# EAGLE board ai_aurora (EAGLE 7.1.0)
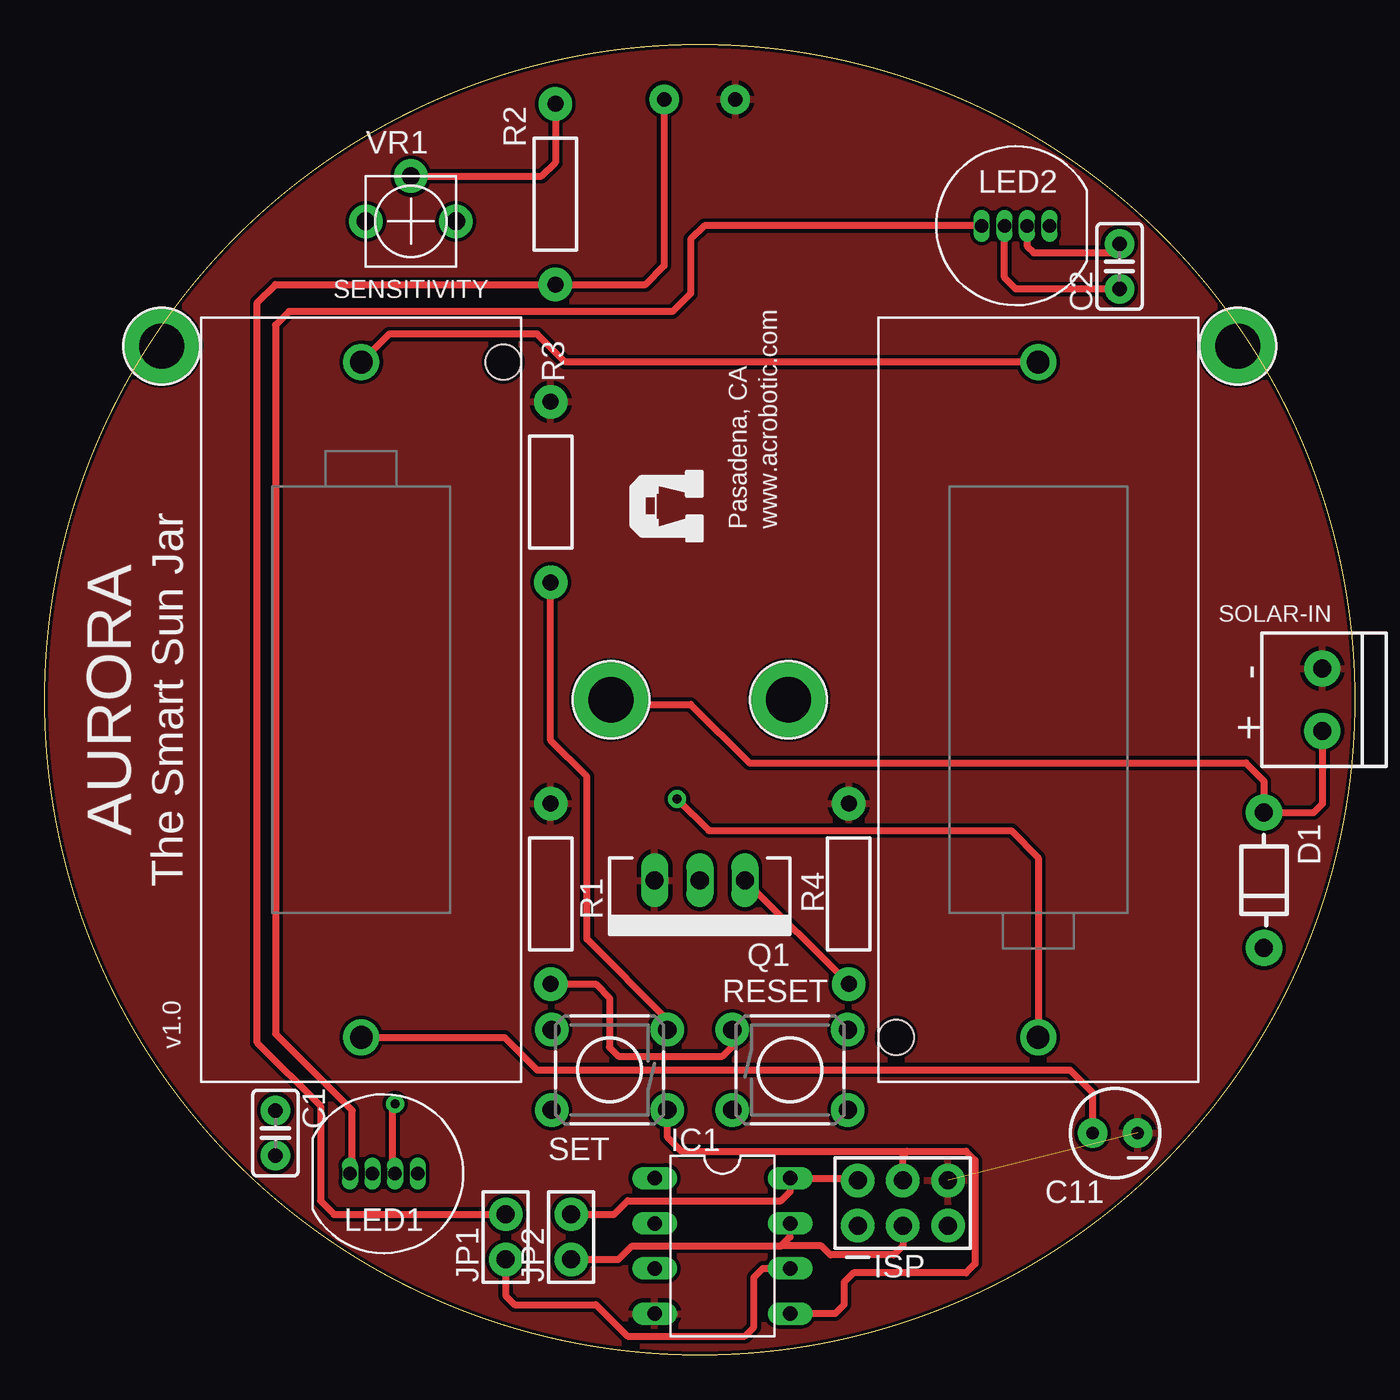
[diagram p0: board, top side]
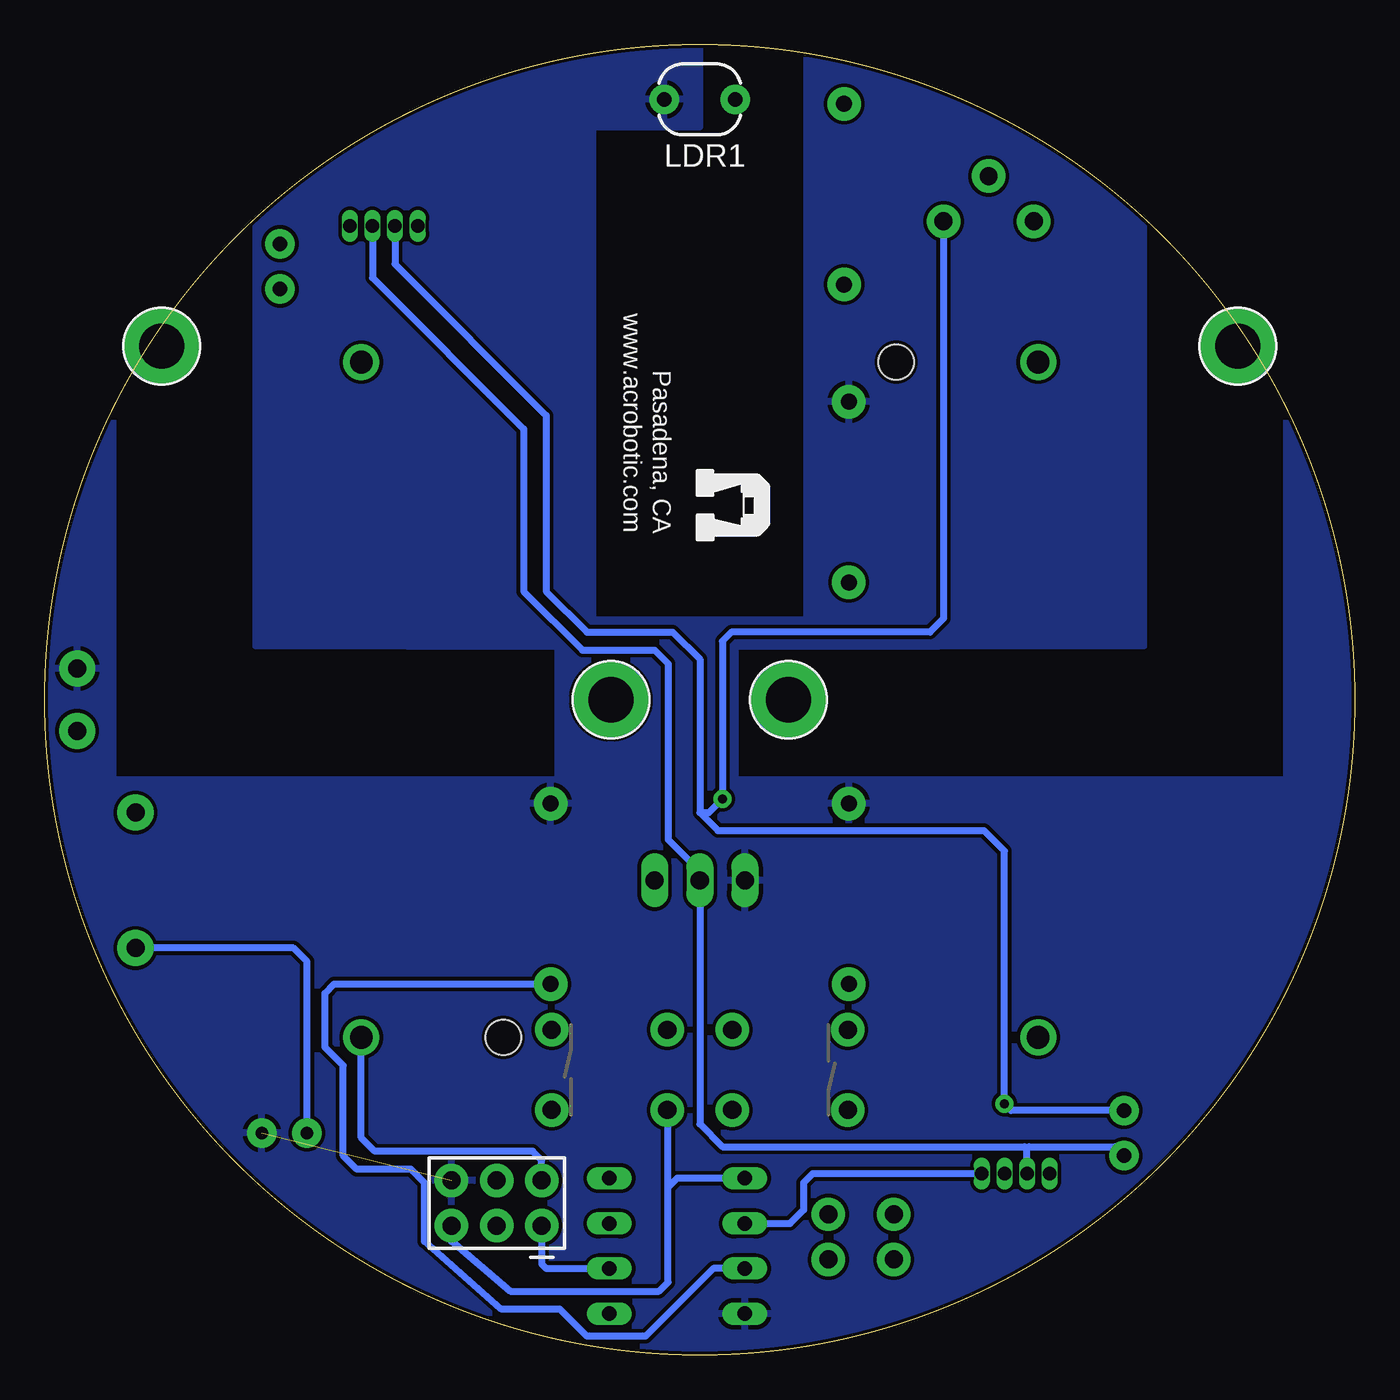
[diagram p1: board, bottom side, seen from below]

Size 73.75 x 73.75 mm. Coordinates in mm from the lower left corner, seen from the top.
Outline: circle at 36.88,36.88 radius 36.88
Copper layers (1*16): Top 0.035mm / dielectric 1.5mm / Bottom 0.035mm
Design rules "ai_2layer *": minimum track width 7mil, minimum drill 15mil, track to track 8mil, track to pad 8mil, pad to pad 8mil, via to via 8mil, smd to smd 8mil, copper to edge 8mil, drill to drill 8mil, minimum pad ring 0mil, minimum via ring 10mil, stop-mask expansion 4mil, vias tented up to drill 20mil, thermal gap 10mil

## Footprints (pad centres in the part's own frame; a part is rotated, then mirrored left to right if it is on the bottom)
BATTERY-CR123A = drill 1.27 pad 2.032: + 0,19; - 0,-19 | hole 2: 8,19
CAP-025X050 = drill 0.813 pad 1.676: 1 -1.27,0; 2 1.27,0
CAP-POL-025X50 = drill 0.7 pad 1.651: A 1.27,0; C -1.27,0
TH-1N914 = drill 1.016 pad 2.032: A -3.81,0; C 3.81,0
DIL08 = drill 0.813 pad 1.27 long: 1 -3.81,-3.81; 2 -1.27,-3.81; 3 1.27,-3.81; 4 3.81,-3.81; 5 3.81,3.81; 6 1.27,3.81; 7 -1.27,3.81; 8 -3.81,3.81
2X03 = drill 1.016 pad 1.88: 1 -2.54,-1.27; 2 -2.54,1.27; 3 0,-1.27; 4 0,1.27; 5 2.54,-1.27; 6 2.54,1.27
1X02 = drill 1.016 pad 1.88: 1 -1.27,0; 2 1.27,0
LDR = drill 0.8 pad 1.676: 1 -2,0; 2 2,0
LED-PL9823-F8 = drill 0.762 pad 0.889 long: 1 -1.905,0; 2 -0.635,0; 3 0.635,0; 4 1.905,0
1X01-PANEL = drill 2.54 pad 4.191: 1 0,0
TO-220 = drill 1.016 pad 1.524 long: 1 -2.54,0; 2 0,0; 3 2.54,0
RES-AXIAL-0.4 = drill 0.9 pad 1.88: P$1 -5.08,0; P$2 5.08,0
SW-SPST-TH06X06 = drill 1.016 pad 1.88: A@1 -3.251,-2.261; A@2 3.251,-2.261; B@1 -3.251,2.261; B@2 3.251,2.261
1X02-ST = drill 1.016 pad 2.032: 1 -1.75,0; 2 1.75,0
POT-05X05 = drill 1 pad 1.88: 1 -2.54,0; 2 0,2.54; 3 2.54,0

## Placement (x,y rotation side)
BAT1  CR123A  [BATTERY-CR123A]  17.82,36.88 0 top
BAT2  CR123A  [BATTERY-CR123A]  55.92,36.88 180 top
C1  0.1uF  [CAP-025X050]  13,12.49 270 top
C2  0.1uF  [CAP-025X050]  60.5,61.26 90 top
C11  4.7uF  [CAP-POL-025X50]  60.24,12.49 180 top
D1  [TH-1N914]  68.62,26.71 270 top
IC1  ATTINY85-DIP  [DIL08]  38.15,6.14 270 top
ISP  2X03  [2X03]  48.3,8.55 0 top
JP1  1X02-PJ  [1X02]  25.95,6.65 90 top
JP2  1X02-PJ  [1X02]  29.64,6.65 90 top
LDR1  LDR-PTH  [LDR]  36.88,70.66 0 bottom
LED1  LED-PL9823-F8  [LED-PL9823-F8]  19.09,10.2 180 top
LED2  LED-PL9823-F8  [LED-PL9823-F8]  54.66,63.55 0 top
M2  1X01-TERM-PANEL  [1X01-PANEL]  67.14,56.78 0 top
M3  1X01-TERM-PANEL  [1X01-PANEL]  6.61,56.78 0 top
PANEL+  1X01-TERM-PANEL  [1X01-PANEL]  31.88,36.88 0 top
PANEL-  1X01-TERM-PANEL  [1X01-PANEL]  41.88,36.88 0 top
Q1  FQP30N06L  [TO-220]  36.88,26.71 180 top
R1  10K  [RES-AXIAL-0.4]  28.49,25.95 270 top
R2  100K  [RES-AXIAL-0.4]  28.75,65.32 90 top
R3  10K  [RES-AXIAL-0.4]  28.49,48.56 270 top
R4  100K  [RES-AXIAL-0.4]  45.26,25.95 270 top
RESET  SW-SPSTTH06X06  [SW-SPST-TH06X06]  41.95,16.05 0 top
SET  SW-SPSTTH06X06  [SW-SPST-TH06X06]  31.8,16.05 180 top
SOLAR-IN  1X02ST  [1X02-ST]  71.91,36.88 90 top
U$4  AI-LOGOM  [AI-LOGO-M]  37.19,45.64 90 top
U$5  AI-LOGOM  [AI-LOGO-M]  37.19,49.96 270 bottom
VR1  1M  [POT-05X05]  20.62,63.8 0 top

## Library data of the parts
BAT1 BAT2 RESET SET = Ai_Electromechanical
C1 C2 C11 R1-R4 VR1 = Ai_Passives
D1 Q1 = Ai_DiscreteSemis
IC1 = Ai_IC
ISP JP1 JP2 M2 M3 PANEL+ PANEL- SOLAR-IN = Ai_Connectors
LDR1 = Ai_Sensors
LED1 LED2 = Ai_LED
U$4 U$5 = Ai_Miscellany

## Nets
-: C1.2 C2.2 LED1.3 LED2.3 Q1.2
DI: IC1.2 LED1.1
DO: LED2.4
GND: C11.C IC1.4 ISP.6 LDR1.1 PANEL-.1 Q1.3 R1.P$1 R3.P$1 R4.P$1 SOLAR-IN.2
LED_EN: IC1.3 Q1.1 R4.P$2
MISO/LDR: IC1.6 ISP.1 JP1.1
MOSI/SET: IC1.5 ISP.4 SET.B@1
N$1: BAT1.+ BAT2.-
N$3: R1.P$2 RESET.B@1
N$4: LED1.4 LED2.1
N$5: R3.P$2 SET.A@1
N$6: R2.P$2 VR1.2
N$7: JP1.2 LDR1.2 R2.P$1
RST: IC1.1 ISP.5 RESET.A@1
SCK/BATT: IC1.7 ISP.3 JP2.1
VBAT: BAT2.+ C1.1 C2.1 IC1.8 ISP.2 JP2.2 LED1.2 LED2.2 VR1.3
VIN: BAT1.- C11.A D1.C
VPANEL: D1.A PANEL+.1 SOLAR-IN.1

## Tracks (layer width: path | path; a pad name or v marks a point on that pad's centre or on a via)
-
  Top 0.406: LED2.3 55.29,62.4 55.67,62.02 59.99,62.02 C2.2
  Bottom 0.406: LED1.3 18.46,11.6 | 18.46,11.6 18.33,11.73 13.51,11.73 C1.2 | LED2.3 55.29,60.62 46.78,52.12 46.78,42.97 43.48,39.67 39.41,39.67 38.65,38.91 38.65,29 36.88,27.22 Q1.2 36.88,13 35.6,11.73 18.59,11.73 18.46,11.6
DI
  Bottom 0.406: IC1.2 31.8,7.41 31.03,8.17 31.03,9.7 30.52,10.2 LED1.1
GND  (1 unrouted)
  pour Bottom: -0.12,-0.12 -0.12,73.88 3.88,73.88 3.88,32.38 34.88,32.38 34.88,39.88 11.88,39.92 11.88,73.88 30.88,73.88 30.88,41.35 42.88,41.35 42.88,69.11 36.88,69.11 36.88,73.88 61.88,73.88 61.88,39.92 44.88,39.88 44.88,32.38 69.88,32.38 69.88,73.88 73.88,73.88 73.88,-0.12
  pour Top: -0.12,-0.12 -0.12,73.88 73.88,73.88 73.88,-0.12
LED_EN
  Top 0.406: Q1.1 R4.P$2
  Bottom 0.406: IC1.3 36.11,4.87 39.92,1.06 43.23,1.06 44.75,2.59 48.05,2.59 52.37,6.39 52.37,9.7 53.13,10.46 56.18,10.46 56.94,11.22 56.94,16.3 57.96,17.32 57.96,20.36 57.45,20.87 R4.P$2
MISO/LDR
  Top 0.406: JP1.1 25.95,3.35 26.46,2.84 31.03,2.84 32.81,1.06 39.41,1.06 39.92,1.57 39.92,4.36 40.43,4.87 IC1.6
  Bottom 0.406: ISP.1 45.77,5.12 45.51,4.87 IC1.6
MOSI/SET
  Top 0.406: ISP.4 48.3,11.22 48.56,11.48 | 48.56,11.48 51.86,11.48 52.37,10.97 52.37,5.12 51.86,4.62 45.51,4.62 45,4.11 45,2.84 44.49,2.33 IC1.5 | SET.B@1 35.05,12.29 35.86,11.48 48.56,11.48
N$1
  Top 0.406: BAT2.- 29.3,55.88 27.73,57.45 19.4,57.45 BAT1.+
N$3
  Top 0.406: R1.P$2 31.03,20.87 31.8,20.11 31.8,17.32 32.3,16.81 38.15,16.81 38.7,17.37 RESET.B@1
N$4
  Top 0.406: LED2.1 37.13,63.55 36.37,62.78 36.37,59.73 35.35,58.72 13.76,58.72 13,57.96 13,18.08 17.32,13.76 17.32,10.97 17.19,10.84 LED1.4
N$5
  Top 0.406: SET.A@1 35.05,18.89 30.52,23.41 30.52,32.56 28.49,34.59 R3.P$2
N$6
  Top 0.406: VR1.2 27.98,66.34 28.75,67.1 R2.P$2
N$7
  Top 0.406: LDR1.2 34.88,61.29 33.83,60.24 R2.P$1 13,60.24 11.98,59.23 11.98,17.57 15.54,14.02 15.54,8.68 16.3,7.92 JP1.2
RST
  Bottom 0.406: ISP.5 50.84,6.39 47.54,3.6 39.16,3.6 38.65,4.11 38.65,9.44 | 38.65,9.44 38.65,13.74 RESET.A@1 | IC1.1 38.15,9.95 38.65,9.44
SCK/BATT
  Top 0.406: JP2.1 32.3,5.38 33.06,6.14 41.45,6.14 | 41.45,6.14 41.95,6.65 IC1.7 | ISP.3 48.3,6.14 47.8,5.63 44.24,5.63 43.73,6.14 41.45,6.14
VBAT  (via drill 0.51)
  Top 0.406: JP2.2 32.05,7.92 32.81,8.68 41.45,8.68 41.95,9.19 IC1.8 45.64,9.95 ISP.2 | v35.6,31.29 37.38,29.51 54.4,29.51 55.92,27.98 BAT2.+ | C2.1 54.66,59.99 54.02,60.62 LED2.2 | LED1.2 19.73,10.59 19.6,10.71 19.6,14.02 v19.73,14.14
  Bottom 0.406: ISP.2 45.77,10.97 46.27,11.48 55.16,11.48 55.92,12.24 BAT2.+ | VR1.3 23.16,41.45 23.92,40.69 35.1,40.69 35.6,40.18 v35.6,31.29 36.37,30.52 36.88,30.52 | C1.1 19.35,13.76 v19.73,14.14 19.73,28.37 20.87,29.51 35.86,29.51 36.88,30.52 | LED2.2 54.02,61.39 45.51,52.88 45.51,42.97 43.23,40.69 38.4,40.69 36.88,39.16 36.88,30.52
VIN
  Top 0.406: BAT1.- 25.9,17.88 27.73,16.05 57.7,16.05 58.97,14.78 C11.A
  Bottom 0.406: C11.A 58.97,22.14 59.73,22.91 D1.C
VPANEL
  Top 0.406: SOLAR-IN.1 71.93,35.11 71.93,31.03 71.42,30.52 D1.A 68.62,32.3 67.61,33.32 39.67,33.32 36.37,36.62 32.05,36.62 31.88,36.8 PANEL+.1

## Text on the board
tPlace: SENSITIVITY | www.acrobotic.com | Pasadena, CA | - | AURORA | The Smart Sun Jar | + | v1.0
bPlace: www.acrobotic.com | Pasadena, CA